# Altium PCB PAS_PCB.PcbDoc
Units mil, origin at the board's own origin, x right, y up, seen from the top; angles counter-clockwise.
Board outline 3190 x 2675 mil, 2 copper layers (L1, L2), stack 62.8 mil thick; 39 components, 38 nets, 149 pads, 23 vias.
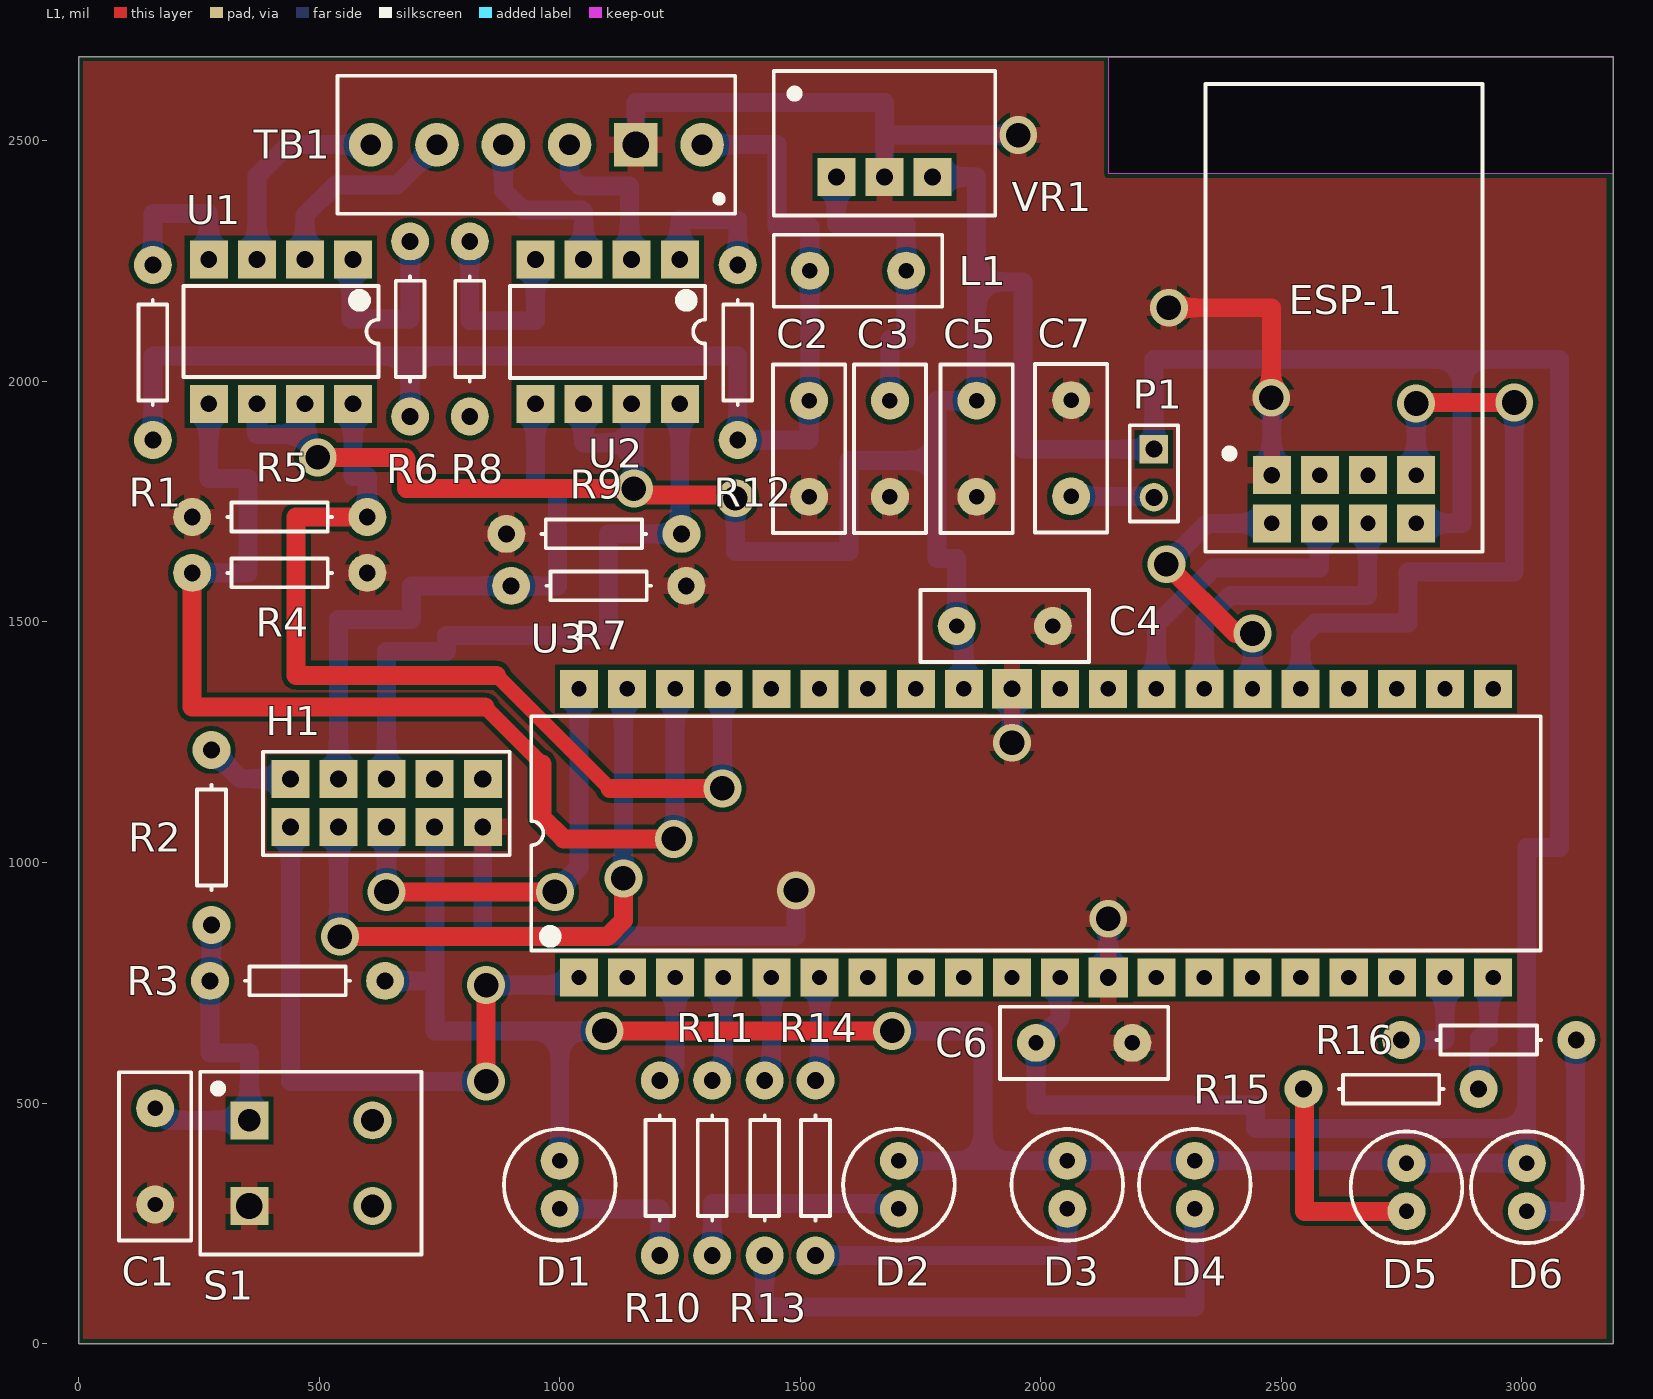
[diagram p0: L1 view]
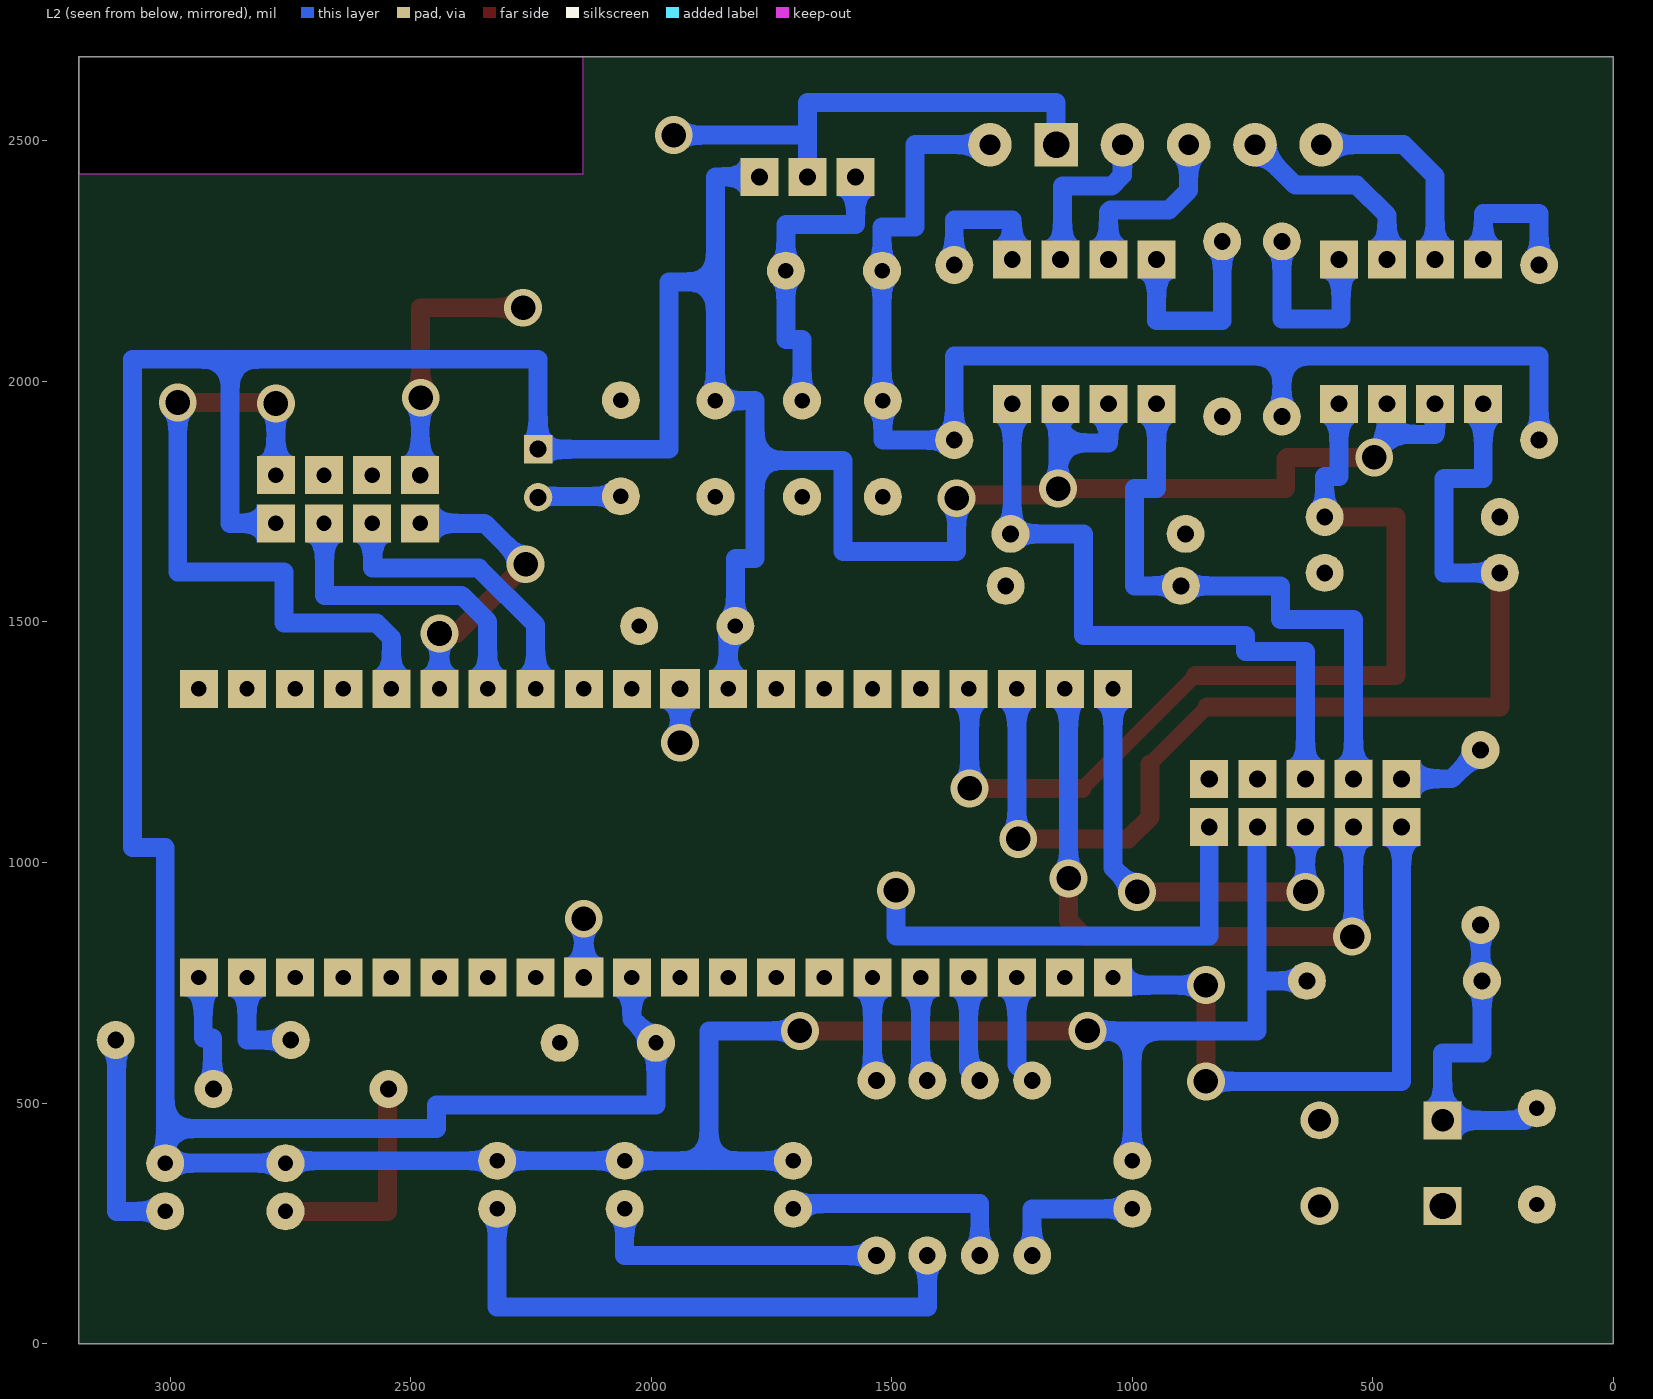
[diagram p1: L2 view, seen from below]

## Layer stack, top to bottom
Top Solder: solder mask 0.1, Solder Resist, Dk 0
L1: signal copper 1.4
Core: dielectric 60, FR-4, Dk 4.6
L2: signal copper 1.4
Bottom Solder: solder mask 0.1, Solder Resist, Dk 0

## Board outline
0,0 3190,0 3190,2675 0,2675
cut-out: 2141,2432 2141,2675 3190,2675 3190,2432
cut-out: 2141,2432

## Design rules (kind name [scope] priority, off if disabled: settings)
AssemblyTestPointUsage [All] p1 off:
AssemblyTestpoint [All] p1 off: testpointundercomponent=TRUE minsize=40 maxsize=100 preferedsize=60 minholesize=0 maxholesize=40 preferedholesize=32 testpointgrid=1 usegrid=TRUE gridtolerance=0.01 allowsidetop=TRUE allowsidebottom=TRUE
Clearance [All] p1: gap=10 ignorepadtopadclearanceinfootprint=FALSE except(0: Arc-Hole Track-Hole SMDPad-Hole THPad-Hole Via-Hole Fill-Hole Poly-Hole Region-Hole Text-Hole)
DiffPairsRouting [All] p1 off: maxlimit=10 minlimit=10 mostfreqgap=10 toplayer_minwidth=15 toplayer_maxwidth=15 toplayer_prefwidth=15 bottomlayer_minwidth=15 bottomlayer_maxwidth=15 bottomlayer_prefwidth=15 maxuncoupledlength=500
FabricationTestPointUsage [All] p1 off: valid=0 allowmultiple=FALSE
FabricationTestpoint [All] p1 off: side=3 testpointundercomponent=TRUE minsize=40 maxsize=100 preferedsize=60 minholesize=0 maxholesize=40 preferedholesize=32 testpointgrid=1 allowsidetop=TRUE allowsidebottom=TRUE usegrid=TRUE gridtolerance=0.01
FanoutControl Fanout_BGA [IsBGA] p1 off: bgadir=Out bgaviamode=Centered fanoutstyle=Auto fanoutdirection=Alternating viagrid=1 // Fanout_BGA (Default Rule)
FanoutControl Fanout_LCC [IsLCC] p2 off: bgadir=Out bgaviamode=Centered fanoutstyle=Auto fanoutdirection=Alternating viagrid=1 // Fanout_LCC (Default Rule)
FanoutControl Fanout_SOIC [IsSOIC] p3 off: bgadir=Out bgaviamode=Centered fanoutstyle=Auto fanoutdirection=Alternating viagrid=1 // Fanout_SOIC (Default Rule)
FanoutControl Fanout_Small [(CompPinCount < 5)] p4 off: bgadir=Out bgaviamode=Centered fanoutstyle=Auto fanoutdirection=OutThenIn viagrid=1 // Fanout_Small (Default Rule)
FanoutControl Fanout_Default [All] p5 off: bgadir=Out bgaviamode=Centered fanoutstyle=Auto fanoutdirection=Alternating viagrid=1 // Fanout_Default (Default Rule)
PolygonConnect [All] p1: connectstyle=Relief reliefconductorwidth=35 reliefentries=4 polygonreliefangle="90 Angle" airgapwidth=10
RoutingLayers "Schematic Routing Layers" [InNet('3.3V')] p1 off: top layer_v5=FALSE bottom layer_v5=TRUE
RoutingLayers [All] p2: top layer_v5=TRUE bottom layer_v5=TRUE
RoutingPriority "Schematic Routing Priority_1" [InNetClass('Power_24V')] p1: routingpriority=1
RoutingPriority "Schematic Routing Priority" [InNet('3.3V')] p2: routingpriority=0
RoutingPriority [All] p3: routingpriority=0
RoutingTopology "Schematic Routing Topology_1" [InNet('3.3V')] p1: topology=Starburst
RoutingTopology "Schematic Routing Topology" [InNetClass('Power_24V')] p2: topology=Daisy_Simple
RoutingTopology [All] p3: topology=Shortest
RoutingVias [All] p1: holewidth=51.18 width=78.74 viastyle="Through Hole" minholewidth=51.18 minwidth=78.74 maxholewidth=51.18 maxwidth=78.74
SolderMaskExpansion [All] p1: expansion=4
Width [All] p1: maxlimit=39.37 minlimit=31.49 preferedwidth=39.37
17 further rules are at their usual default settings.

## Classes and differential pairs
net class Power_24V: NetC2_2
net class Power_3.3V: 3.3V
net class Pas_Schematic_Nets: 3.3V Alarm_Signal1 Alarm_Signal2 Alarm_Signal3 Alarm_Signal4 GND M\C\L\R\ NetC1_1 NetC2_2 NetC3_1 NetC7_1 NetC?_1 NetC?_2 NetD1_2 NetD2_2 NetD3_2 NetD4_2 NetD5_2 NetD6_2 NetESP-1_2 NetESP-1_3 NetH1_2 NetH1_3 NetH1_5 NetH1_8 NetH1_10 NetR1_1 NetR6_1 NetR8_2 NetR10_1 NetR11_2 NetR12_1 NetR13_2 NetR14_2 NetR15_1 NetR16_1 NetS1_B NetS1_D NetTB1_3 NetTB1_4 NetTB1_5 NetTB1_6 NetU3_2 NetU3_7 NetU3_8 NetU3_9 NetU3_10 NetU3_13 NetU3_14 NetU3_15 NetU3_16 NetU3_17 NetU3_18 NetU3_21 NetU3_22 NetU3_23 NetU3_24 NetU3_29 NetU3_30 NetU3_33 NetU3_34 NetU3_35 NetU3_36 RC6 RC7 WIFIMOD_CH-PD WIFIMOD_RST

## Components (designator, comment, footprint, x,y, rotation, side; value= is the part's Value field where it differs from the comment)
C1 "CAP_100nF" AXIAL_0.2 159,389 r270 top value=100nF
C2 "CAP_3.3µF" AXIAL_0.2 1518.45,1860 r90 top value=3.3µF
C3 "CAP_10µF" AXIAL_0.2 1686.33,1860 r270 top value=10µF
C4 "CAP_100nF" AXIAL_0.2 1925,1491.53 r0 top value=100nF
C5 "CAP_10µF" AXIAL_0.2 1866.41,1860 r270 top value=10µF
C6 "CAP_100nF" AXIAL_0.2 2090,625 r0 top value=100nF
C7 "CAP_100nF" AXIAL_0.2 2063,1861 r90 top value=100nF
D1 "LED_Red" LED-1 1000,330 r0 top
D2 "LED_Red" LED-1 1705,330 r0 top
D3 "LED_Red" LED-1 2055,330 r0 top
D4 "LED_Red" LED-1 2320,330 r0 top
D5 "LED_Green" LED-1 2760,325 r0 top
D6 "LED_Green" LED-1 3010,325 r0 top
ESP-1 "ESP-01" ESP-01 2480,1805 r0 top
H1 "Header 5X2" HDR2X5 440,1074 r0 top
L1 "Inductor_5.6µH" AXIAL_0.2 1620,2230 r0 top value=5.6µH
P1 "Header 2" HDR1X2 2235,1859 r270 top
R1 "Res_1.15K" AXIAL-0.3 154.25,2060 r270 top value=1.15KO
R2 "Res_1K" AXIAL-0.3 276,1052 r90 top value=1KO
R3 "Res_10K" AXIAL-0.3 455,754.01 r0 top value=10KO
R4 "Res_510" AXIAL-0.3 418,1602 r0 top value=510KO
R5 "Res_510" AXIAL-0.3 418,1718 r180 top value=510KO
R6 "Res_1.15K" AXIAL-0.3 688.99,2109 r270 top value=1.15KO
R7 "Res_510" AXIAL-0.3 1081,1575 r0 top value=510KO
R8 "Res_1.15K" AXIAL-0.3 813,2109 r90 top value=1.15KO
R9 "Res_510" AXIAL-0.3 1071,1683 r180 top value=510KO
R10 "Res_73.2" AXIAL-0.3 1207.97,365 r270 top value=73.2O
R11 "Res_73.2" AXIAL-0.3 1316.98,365 r90 top value=73.2O
R12 "Res_1.15K" AXIAL-0.3 1370,2060 r270 top value=1.15KO
R13 "Res_73.2" AXIAL-0.3 1425.99,365 r90 top value=73.2O
R14 "Res_73.2" AXIAL-0.3 1531.56,365 r90 top value=73.2O
R15 "Res_130" AXIAL-0.3 2728,529 r180 top value=130O
R16 "Res_130" AXIAL-0.3 2931,631 r0 top value=130O
S1 "SW-SPST_B3F-1000" SW-SPST-1 482.88,375 r0 top
TB1 "6-pole Terminal Block" "Molex WM7862-ND" 1365,2635.44 r180 top
U1 "IlD74" DIP-8 420.46,2103.5 r270 top
U2 "IlD74" DIP-8 1099.47,2103.5 r270 top
U3 "PIC18F45K22-I/P" MCHP-PDIP-P40 1990,1061.05 r90 top
VR1 "REG" SIP3 1575,2425 r0 top

## Footprints (in the part's own frame and the unit in brackets; to place one, negate y for a bottom-side part, rotate by r counter-clockwise, add the part's x,y. Pads: shape width x height; smd on the part's side, far side on the other; paste and mask are expansions set on the pad)
AXIAL-0.3 [mil] "Axial Device, Thru-Hole; 2 Leads; 0.3 in Pin Spacing"
  round 79 hole 35: 1(-182,0) 2(182,0)
  silkscreen extent -109,-30 109,30
AXIAL_0.2 [mil] "Resistor-style footprint for Radial Cap, Thru-Hole; 2 Leads; 0.2 in Pin Spacing"
  round 79 hole 32: 1(-100,0) 2(100,0)
  silkscreen extent -175,-75 175,75
DIP-8 [mil] "DIP; 8 Leads; Row Spacing 7.62 mm; Pitch 2.54 mm"
  rect 79x79 hole 35: 1(-150,150) 2(-150,50) 3(-150,-50) 4(-150,-150) 5(150,-150) 6(150,-50) 7(150,50) 8(150,150)
  silkscreen extent -95,-203 95,203, body extent -142,-203 142,203, height 200
ESP-01 [mil] "Thru-Hole, 8 Leads, 2.54mm Pitch"
  rect 79x79 hole 35: 1(0,0)
  rect 79x79 hole 32: 2(100,0) 3(200,0) 4(300,0) 5(0,-100) 6(100,-100) 7(200,-100) 8(300,-100)
  silkscreen extent -138,-159 438,813
HDR1X2 [mm] "Connector; Header; 2 Position"
  rect 1.5x1.5 hole 0.9: 1(0,0)
  round 1.5 hole 0.9: 2(2.54,0)
  silkscreen extent -1.27,-1.27 3.81,1.27
HDR2X5 [mil] "Connector; Header; 5x2 Position"
  rect 79x79 hole 35.43: 1(0,0) 2(0,100) 3(100,0) 4(100,100) 5(200,0) 6(200,100) 7(300,0) 8(300,100) 10(400,100)
  rect 79x79 hole 35: 9(400,0)
  silkscreen extent -57,-59 456,156
LED-1 [mil] "LED; 2 Leads"
  round 79 hole 32: 1(0,50) 2(0,-50)
  silkscreen extent -116,-116 116,116
MCHP-PDIP-P40 [mil] "PDIP, 40-Leads, Body 51.75x13.53mm, Pitch 2.54mm"
  rect 79x79 hole 32: 1(-300,950) 2(-300,850) 3(-300,750) 4(-300,650) 5(-300,550) 6(-300,450) 7(-300,350) 8(-300,250) 9(-300,150) 10(-300,50) 11(-300,-50) 13(-300,-250) 14(-300,-350) 15(-300,-450) 16(-300,-550) 17(-300,-650) 18(-300,-750) 19(-300,-850) 20(-300,-950) 21(300,-950) 22(300,-850) 23(300,-750) 24(300,-650) 25(300,-550) 26(300,-450) 27(300,-350) 28(300,-250) 29(300,-150) 30(300,-50) 32(300,150) 33(300,250) 34(300,350) 35(300,450) 36(300,550) 37(300,650) 38(300,750) 39(300,850) 40(300,950)
  rect 82.68x82.68 hole 35: 12(-300,-150) 31(300,50)
  silkscreen extent -244,-1049 243,1049, body extent -305,-1047 305,1047, height 250
"Molex WM7862-ND" [mil] "6 Position Wire to Board Terminal Block Horizontal with Board 0.138\" (3.50mm) Through Hole"
  round 90.55 hole 43.31: 1(69,143.5) 3(344.5,143.5) 4(482.29,143.5) 5(620.1,143.5) 6(757.88,143.5)
  rect 90.55x90.55 hole 55: 2(206.7,143.5)
  silkscreen extent 0,0 827,287
SIP3 [mil] "SIP, 3 Leads, Pitch 2.54mm"
  rect 79x79 hole 35: 1(0,0) 2(100,0) 3(200,0)
  silkscreen extent -130,-80 330,220
SW-SPST-1 [mil] "DIP. 4 Leads, Row spacing 6.50mm, Pitch 4.50mm"
  rect 79x79 hole 47: 1(-128,89)
  round 79 hole 47: 2(128,89) 4(128,-89)
  rect 79x79 hole 55: 3(-128,-89)
  silkscreen extent -230,-190 230,190

## Part data
C1 C4 C6 C7: "Capacitor", Supplier Part Number 1=478-3188-ND, LatestRevisionDate=17-Jul-2002, LatestRevisionNote="Re-released for DXP Platform.", PackageDescription="Radial Cap, Thru-Hole; 2 Leads; 0.3 in Pin Spacing", PackageReference=RAD-0.3, Published=8-Jun-2000, Publisher="Altium Limited", Supplier 1=Digi-Key
C2: "Capacitor", Supplier Part Number 1=445-173440-1-ND, LatestRevisionDate=17-Jul-2002, LatestRevisionNote="Re-released for DXP Platform.", PackageDescription="Radial Cap, Thru-Hole; 2 Leads; 0.3 in Pin Spacing", PackageReference=RAD-0.3, Published=8-Jun-2000, Publisher="Altium Limited", Supplier 1=Digi-Key
C3 C5: "Capacitor", Supplier Part Number 1=445-173302-1-ND, LatestRevisionDate=17-Jul-2002, LatestRevisionNote="Re-released for DXP Platform.", PackageDescription="Radial Cap, Thru-Hole; 2 Leads; 0.3 in Pin Spacing", PackageReference=RAD-0.3, Published=8-Jun-2000, Publisher="Altium Limited", Supplier 1=Digi-Key
D1 D2 D3 D4: "Typical RED GaAs LED", Supplier Part Number 1=754-1871-ND, Supplier 1=Digi-Key
D5 D6: "Green 568nm LED Indication - Discrete 2.2V Radial", Supplier Part Number 1=754-1474-ND, Supplier 1=Digi-Key
ESP-1: "802.11b/g/n Wi-Fi SOC module", LatestRevisionDate=17-Jul-2002, LatestRevisionNote="Re-released for DXP Platform.", Publisher="Altium Limited"
H1: "Header, 5-Pin, Dual row", LatestRevisionDate=17-Jul-2002, LatestRevisionNote="Re-released for DXP Platform.", Publisher="Altium Limited"
L1: "5.6µH Shielded Molded Inductor 335mA 720 mOhm Max Axial", Supplier Part Number 1=M10123-ND, Code_IEC=1005, Code_JEITA=0402, LatestRevisionDate=29-May-2009, LatestRevisionNote="IPC-7351 Footprint Added.", PackageDescription="Chip Inductor", PackageReference=0402-A, Published=8-Jun-2000, Publisher="Altium Limited", Supplier 1=Digi-Key
P1: "Header, 2-Pin", LatestRevisionDate=17-Jul-2002, LatestRevisionNote="Re-released for DXP Platform.", Publisher="Altium Limited"
R1 R6 R8 R12: "1.15 kOhms ±1% 0.4W Through Hole Resistor Axial Metal Film", Supplier Part Number 1=PPC1.15KYCT-ND, LatestRevisionDate=17-Jul-2002, LatestRevisionNote="Re-released for DXP Platform.", PackageDescription="Axial Device, Thru-Hole; 2 Leads; 0.3 in Pin Spacing", PackageReference=AXIAL-0.3, Published=8-Jun-2000, Publisher="Altium Limited", Supplier 1=Digi-Key
R2: "1 kOhms ±1% 0.25W, 1/4W Through Hole Resistor Axial Flame Retardant Coating, Safety Metal Film", Supplier Part Number 1=RNF14FTD1K00CT-ND, LatestRevisionDate=17-Jul-2002, LatestRevisionNote="Re-released for DXP Platform.", PackageDescription="Axial Device, Thru-Hole; 2 Leads; 0.3 in Pin Spacing", PackageReference=AXIAL-0.3, Published=8-Jun-2000, Publisher="Altium Limited", Supplier 1=Digi-Key
R3: "10 kOhms ±1% 0.25W, 1/4W Through Hole Resistor Axial Flame Retardant Coating, Safety Metal Film", Supplier Part Number 1=RNF14FTD10K0CT-ND, LatestRevisionDate=17-Jul-2002, LatestRevisionNote="Re-released for DXP Platform.", PackageDescription="Axial Device, Thru-Hole; 2 Leads; 0.3 in Pin Spacing", PackageReference=AXIAL-0.3, Published=8-Jun-2000, Publisher="Altium Limited", Supplier 1=Digi-Key
R4 R5 R7 R9: "510 Ohms ±1% 0.25W, 1/4W Through Hole Resistor Axial Flame Retardant Coating, Safety Metal Film", Supplier Part Number 1=S510CACT-ND, LatestRevisionDate=17-Jul-2002, LatestRevisionNote="Re-released for DXP Platform.", PackageDescription="Axial Device, Thru-Hole; 2 Leads; 0.3 in Pin Spacing", PackageReference=AXIAL-0.3, Published=8-Jun-2000, Publisher="Altium Limited", Supplier 1=Digi-Key
R10 R11 R13 R14: "73.2 Ohms ±1% 0.25W, 1/4W Through Hole Resistor Axial Metal Film", Supplier Part Number 1=73.2XBK-ND, LatestRevisionDate=17-Jul-2002, LatestRevisionNote="Re-released for DXP Platform.", PackageDescription="Axial Device, Thru-Hole; 2 Leads; 0.3 in Pin Spacing", PackageReference=AXIAL-0.3, Published=8-Jun-2000, Publisher="Altium Limited", Supplier 1=Digi-Key
R15 R16: "130 Ohms ±1% 0.25W, 1/4W Through Hole Resistor Axial Metal Film", Supplier Part Number 1=130XBK-ND, Supplier 1=Digi-Key
S1: "Tactile Switch SPST-NO Top Actuated Through Hole", Supplier Part Number 1=SW400-ND, LatestRevisionDate=17-Jul-2002, LatestRevisionNote="Re-released for DXP Platform.", PackageDescription="Switch; 2 Leads", PackageReference=SPST-2, Published=24-Mar-1999, Publisher="Altium Limited", Supplier 1=Digi-Key
TB1: Supplier Part Number 1=WM7862-ND, Supplier 1=Digi-Key
U1 U2: "Optoisolator Transistor Output 5300Vrms 2 Channel 8-DIP", Supplier Part Number 1=ILD74-ND, DatasheetVersion=Nov-2003, LatestRevisionDate=04-Mar-2005, LatestRevisionNote="Sch pins 3 & 4 Swapped.", PackageReference=DIP-4, Published=24-Mar-1999, Publisher="Altium Limited", Supplier 1=Digi-Key
U3: "Low-Power, High-Performance Microcontroller with XLP Technology, 64 MHz, 35 I/O, -40 to 85 degC, 40-pin PDIP (P40), Tube", Manufacturer=Microchip, Operation Voltage Range="2.3V - 5.5V", Supplier Part Number 1=PIC18F45K22-I/P-ND, # of A/D Channels=28, ComponentLink1Description=Datasheet, ComponentLink1URL=http://ww1.microchip.com/downloads/en/DeviceDoc/41412F.pdf, ComponentLink2Description="Package Specification", ComponentLink2URL=http://www.microchip.com/stellent/groups/techpub_sg/documents/packagingspec/en012702.pdf, ComponentLink3Description="URL Link1", ComponentLink3URL="Product URL:http://www.microchip.com/datasheet/PIC18F45K22", DatasheetVersion="Rev. F", Digital Communication="2 -A/E/USART, 2 -MSSP(SPI/I2C)", EEPROM Data Memory (bytes)=256, I/O Pins=35, Internal Oscillator="16 MHz, 31 kHz", Max. CPU Speed MHz=64, Memory Type=Flash, Mounting Technology="Through Hole", PackageDescription="40-Lead Plastic Dual In-Line Package, Body 51.75 x 13.53 mm, Pitch 2.54 mm", PackageReference=PDIP-P40, PackageVersion="C04-016B, 04/2013", Packing=TUBE, PartNumber=PIC18F45K22-I/P, Program Memory KBytes=32, Program Memory KWords=16, RAM=1536, RoHS=TRUE, Supplier 1=Digi-Key, Timers="3 - 8-bit, 4 - 16-bit"
VR1: library part R-783.3-0.5, "Non-Isolated DC/DC Converters 0.5A DC/DC REG 4.75-34Vin 3.3Vout", Supplier Part Number 1=945-1035-ND, Supplier 1=Digi-Key

## Via types
v1: diameter 78.74, hole 51.18, L1 to L2, 23 vias

## Nets (pads, with @x,y where several pads share a name; then routed paths per layer and width w, separated by ;. In a path a pad name is that pad's centre, name@x,y a point inside that pad or via, vN(x,y) a via of type N, cw(c..) or ccw(c..) an arc to the next point about the centre after c; other vN are vias at no path point)
3.3V: C4.1 C5.1 C6.1 D1.1 D2.1 D3.1 D4.1 D5.1 D6.1 ESP-1.8 H1.7 P1.1 R3.2 U1.6 U1.7 U2.6 U2.7 U3.11 U3.32 VR1.3 | length 12344
  L1 w39.37: v1(497,1842) 678,1842 681,1839 681,1777 v1(1154,1777) 1167,1764 1358,1764 v1(1365,1757) ; v1(1093,650) v1(1691,650)
  L2 w39.37: U1.6 370.46,1890 470.46,1890 ; U1.7 470.46,1890 ; v1(497,1842) 470.46,1890 ; R3.2 738.99,754.01 741,752 ; 741,1033 741,752 ; D1.1 1000,650 ; U2.6 1049.47,1872 1154,1872 ; v1(1093,650) 1000,650 ; U2.7 1154,1948.97 1154,1872 ; v1(1154,1777) 1154,1872 ; v1(1365,1757) 1365,1646 1601,1646 1601,1836 1784,1836 ; v1(1691,650) 1880,650 1880,380 ; D2.1 1880,380 ; VR1.3 1866.41,2425 1866.41,2207 ; U3.32 1840,1476.53 C4.1 1825,1632 1784,1632 1784,1836 ; U3.11 2040,675 C6.1 1990,496 2446,496 2446,447 3010,447 ; ESP-1.8 2875,1705 2875,2046 ; 741,752 741,650 1000,650 ; 1784,1836 1784,1960 C5.1 1866.41,2207 ; 1866.41,2207 1963,2207 1963,1859 P1.1 2235,2046 2875,2046 ; 1880,380 D3.1 D4.1 2760,380 D5.1 D6.1 3010,447 ; 2875,2046 3078,2046 3078,1031 3010,1031 3010,447
Alarm_Signal1: H1.4 R7.1 U2.5 | length 1280
  L2 w39.37: H1.4 540,1505 692,1505 692,1575 R7.1 995,1575 995,1777 949.47,1777 U2.5
Alarm_Signal2: H1.6 R9.1 U2.8 | length 1392.5
  L2 w39.37: H1.6 640,1439 765,1439 765,1472 1101,1472 1101,1683 R9.1@1249.47,1683 ; U2.8 R9.1@1249.47,1683 ; R9.1 R9.1@1249.47,1683
Alarm_Signal3: R4.1 U1.5 U3.38 | length 2320.8
  L1 w31.49: 845,1323 963,1205
  L1 w39.37: R4.1 236,1323 845,1323 ; 963,1205 963,1094 1008,1049 v1(1237,1049)
  L2 w39.37: R4.1 352,1602 352,1798 270.46,1798 U1.5 ; v1(1237,1049) 1240,1052 U3.38
Alarm_Signal4: R5.1 U1.8 U3.37 | length 1933.3
  L1 w31.49: 869,1389 1104,1154
  L1 w39.37: R5.1 452,1718 452,1389 869,1389 ; 1104,1154 v1(1338,1154)
  L2 w39.37: U1.8 570.46,1802 600,1802 R5.1 ; v1(1338,1154) 1338,1359.05 U3.37
GND: C1.2 C2.1 C3.2 C4.2 C5.2 C6.2 C7.2 ESP-1.1 H1.9 R4.2 R5.2 R7.2 R9.2 S1.3 TB1.2 U3.12 U3.31 VR1.2 | length 2806.2
  L1 w39.37: v1(2266,2153) 2479,2153 v1(2479,1966)
  L2 w39.37: H1.9 840,847 1491,847 v1(1491,942) ; TB1.2 1158.3,2580 1675,2580 1675,2512 ; VR1.2 1675,2512 ; v1(1940,1249) U3.31 ; v1(1953,2512) 1675,2512 ; U3.12 v1(2140,883) ; v1(2479,1966) 2480,1965 ESP-1.1
M\C\L\R\: H1.1 U3.1 | length 1345
  L1 w39.37: v1(847,545) v1(847,745)
  L2 w39.37: H1.1 440,545 v1(847,545) ; v1(847,745) 1040,745 U3.1
NetC1_1: C1.1 R2.1 R3.1 S1.1 | length 695.4
  L2 w39.37: C1.1 184,464 S1.1 354.88,604 273,604 R3.1 276,757.01 R2.1
NetC2_2: C2.2 L1.1 R1.2 R6.2 R12.2 TB1.1 | length 2679.7
  L2 w39.37: R1.2 154.25,2053 688.99,2053 ; R6.2 688.99,2053 ; TB1.1 1451.5,2491.94 1451.5,2321 1520,2321 L1.1 1520,1960 C2.2 1518.45,1878 R12.2 1370,2053 688.99,2053
NetC3_1: C3.1 L1.2 VR1.1 | length 643.7
  L2 w39.37: VR1.1 1575,2326 1720,2326 L1.2 1720,2087 1686.33,2087 C3.1
NetC7_1: C7.1 P1.2 | length 174
  L2 w39.37: C7.1 2235,1761 P1.2
NetD1_2: D1.2 R10.2 | length 305
  L2 w39.37: D1.2 1207.97,280 R10.2
NetD2_2: D2.2 R11.1 | length 507
  L2 w39.37: R11.1 1316.98,291 1705,291 D2.2
NetD3_2: D3.2 R14.1 | length 620.4
  L2 w39.37: R14.1 2055,183 D3.2
NetD4_2: D4.2 R13.1 | length 1205
  L2 w39.37: R13.1 1425.99,76 2320,76 D4.2
NetD5_2: D5.2 R15.2 | length 455
  L1 w39.37: R15.2@2548,518 2548,275 D5.2
NetD6_2: D6.2 R16.2 | length 459
  L2 w39.37: D6.2 3111,275 3111,631 R16.2
NetH1_2: H1.2 R2.2 | length 188.9
  L2 w39.37: R2.2 336,1174 H1.2
NetH1_3: H1.3 U3.39 | length 1323.7
  L1 w39.37: v1(543,846) 1099.25,846 1132.25,879 v1(1132.25,967)
  L2 w39.37: H1.3 540,846 v1(543,846) ; v1(1132.25,967) 1132.25,1361.05 U3.39
NetH1_5: H1.5 U3.40 | length 927.8
  L1 w39.37: v1(640,939) v1(990,939)
  L2 w39.37: v1(640,939) H1.5 ; v1(990,939) 1040,989 U3.40
NetR1_1: R1.1 U1.4 | length 318.7
  L2 w39.37: R1.1 154.25,2349 270.46,2349 U1.4
NetR6_1: R6.1 U1.1 | length 411.9
  L2 w39.37: U1.1 566,2253.5 566,2130 688.99,2130 R6.1
NetR8_2: R8.2 U2.4 | length 429
  L2 w39.37: R8.2 813,2126 949.47,2126 U2.4
NetR10_1: R10.1 U3.3 | length 227.3
  L2 w39.37: R10.1 1240,579.03 U3.3
NetR11_2: R11.2 U3.4 | length 223.6
  L2 w39.37: R11.2 1340,570.02 U3.4
NetR12_1: R12.1 U2.1 | length 297
  L2 w39.37: U2.1 1249.47,2336 1370,2336 R12.1
NetR13_2: R13.2 U3.5 | length 219.8
  L2 w39.37: R13.2 1440,561.01 U3.5
NetR14_2: R14.2 U3.6 | length 217.5
  L2 w39.37: R14.2 1540,555.45 U3.6
NetR15_1: R15.1 U3.20 | length 271
  L2 w39.37: R15.1@2912,518 2912,635 2931,635 2931,761.05 U3.20
NetR16_1: R16.1 U3.19 | length 221
  L2 w39.37: R16.1 2840,631 U3.19
NetTB1_3: TB1.3 U2.2 | length 351.6
  L2 w39.37: TB1.3 1020.5,2428.5 1043,2406 1145,2406 1145,2257.97 U2.2
NetTB1_4: TB1.4 U2.3 | length 378.8
  L2 w39.37: TB1.4 882.71,2397.29 923.37,2356.63 1045,2356.63 1049.47,2352.16 U2.3
NetTB1_5: TB1.5 U1.2 | length 426.9
  L2 w39.37: U1.2 470.46,2345.09 533.37,2408 660.95,2408 TB1.5
NetTB1_6: TB1.6 U1.3 | length 436.7
  L2 w39.37: U1.3 370.46,2426.46 435.95,2491.94 TB1.6
RC6: ESP-1.4 U3.25 | length 1374.6
  L1 w39.37: v1(2780,1954) 2782,1956 v1(2984,1956)
  L2 w39.37: U3.25 2540,1467 2571,1498 2763,1498 2763,1604 2984,1604 v1(2984,1956) ; ESP-1.4 v1(2780,1954)
RC7: ESP-1.5 U3.26 | length 607.8
  L1 w39.37: v1(2261,1620) 2405,1476 v1(2440,1476)
  L2 w39.37: v1(2261,1620) 2346,1705 ESP-1.5 ; U3.26 v1(2440,1476)
WIFIMOD_CH-PD: ESP-1.6 U3.28 | length 614.8
  L2 w39.37: U3.28 2240,1494 2358,1612 2579,1612 2579,1705 ESP-1.6
WIFIMOD_RST: ESP-1.7 U3.27 | length 652.3
  L2 w39.37: U3.27 2340,1501 2394,1555 2679,1555 2679,1705 ESP-1.7
pads on no net: ESP-1.2 ESP-1.3 H1.8 H1.10 R8.1 S1.2 S1.4 U3.2 U3.7 U3.8 U3.9 U3.10 U3.13 U3.14 U3.15 U3.16 U3.17 U3.18 U3.21 U3.22 U3.23 U3.24 U3.29 U3.30 U3.33 U3.34 U3.35 U3.36

## Polygon pours and split planes (outlines as drawn)
GND on L1 "GND_L01_P001" (solid, remove dead copper, pour order 1): 10,2665 20,2665 3175,2665 3175,10 10,10

## Silkscreen, mask and mechanical layers (free items; w line width, h text height)
Route Tool Path (Mech10):
  lines w39.37: -19.69,0 ccw(c0,0) 0,-19.69 ; -19.69,0 ccw(c0,0) 0,-19.69 ; -19.69,0 -19.69,2675 ; -19.69,2675 cw(c0,2675) 0,2694.69 ; -19.69,2675 cw(c0,2675) 0,2694.69 ; 0,-19.69 3190,-19.69 ; 0,2694.69 2141,2694.69 ; 2141,2694.69 cw(c2141,2675) 2160.69,2675 ; 2141,2694.69 cw(c2141,2675) 2160.69,2675 ; 2160.69,2675 2160.69,2451.69 3190,2451.69 ; 3190,-19.69 ccw(c3190,0) 3209.69,0 ; 3190,-19.69 ccw(c3190,0) 3209.69,0 ; 3190,2451.69 cw(c3190,2432) 3209.69,2432 ; 3190,2451.69 cw(c3190,2432) 3209.69,2432 ; 3209.69,0 3209.69,2432